# EAGLE board multiprise (EAGLE 5.06)
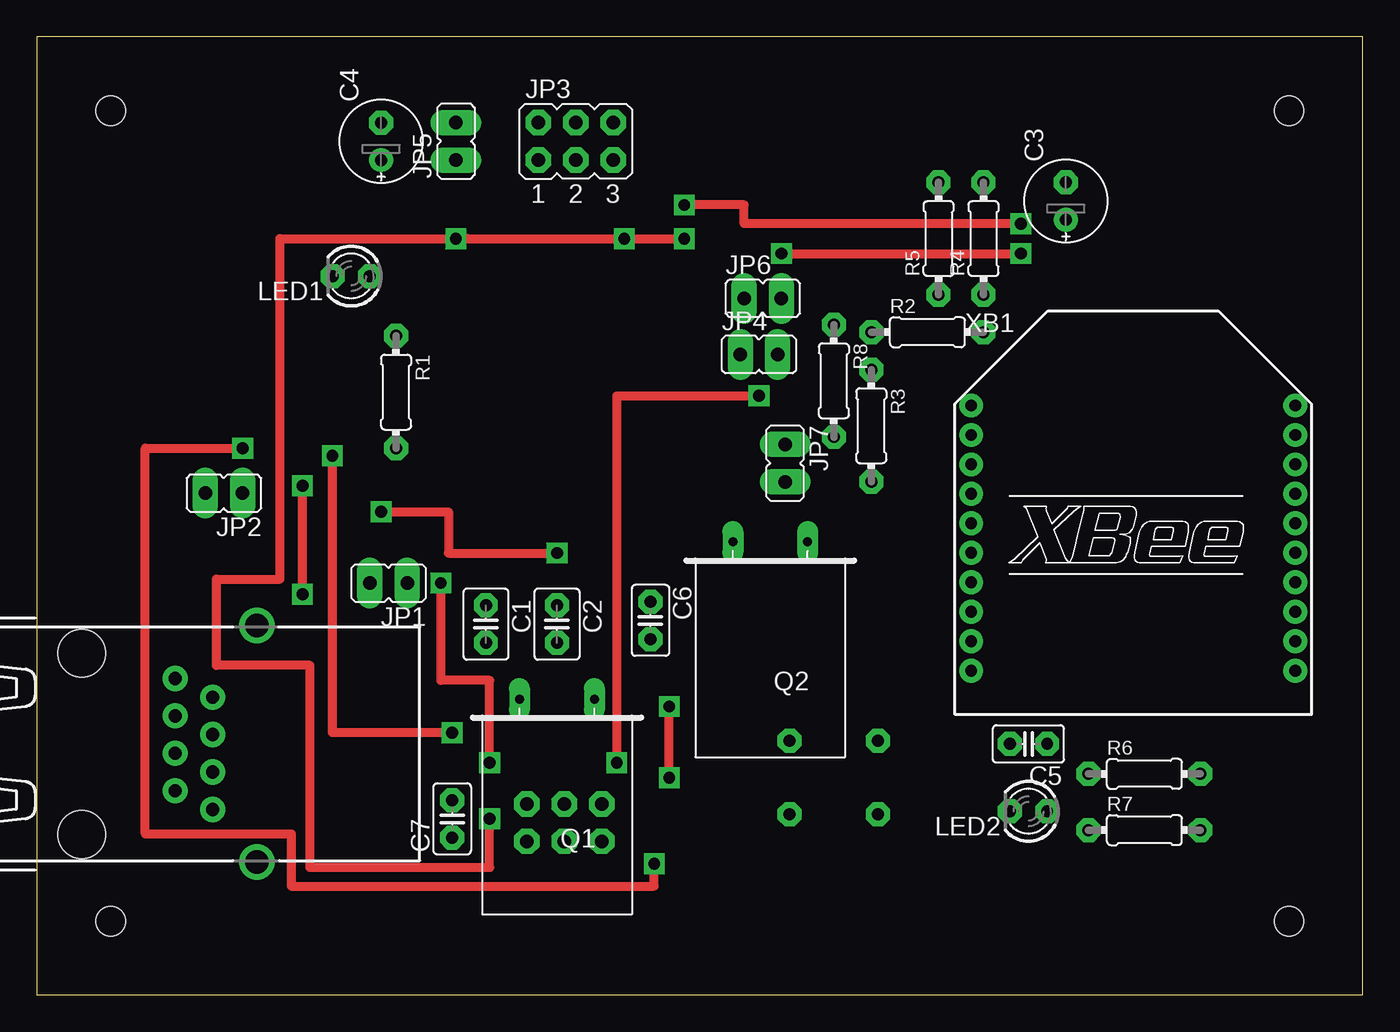
[diagram p0: board, top side]
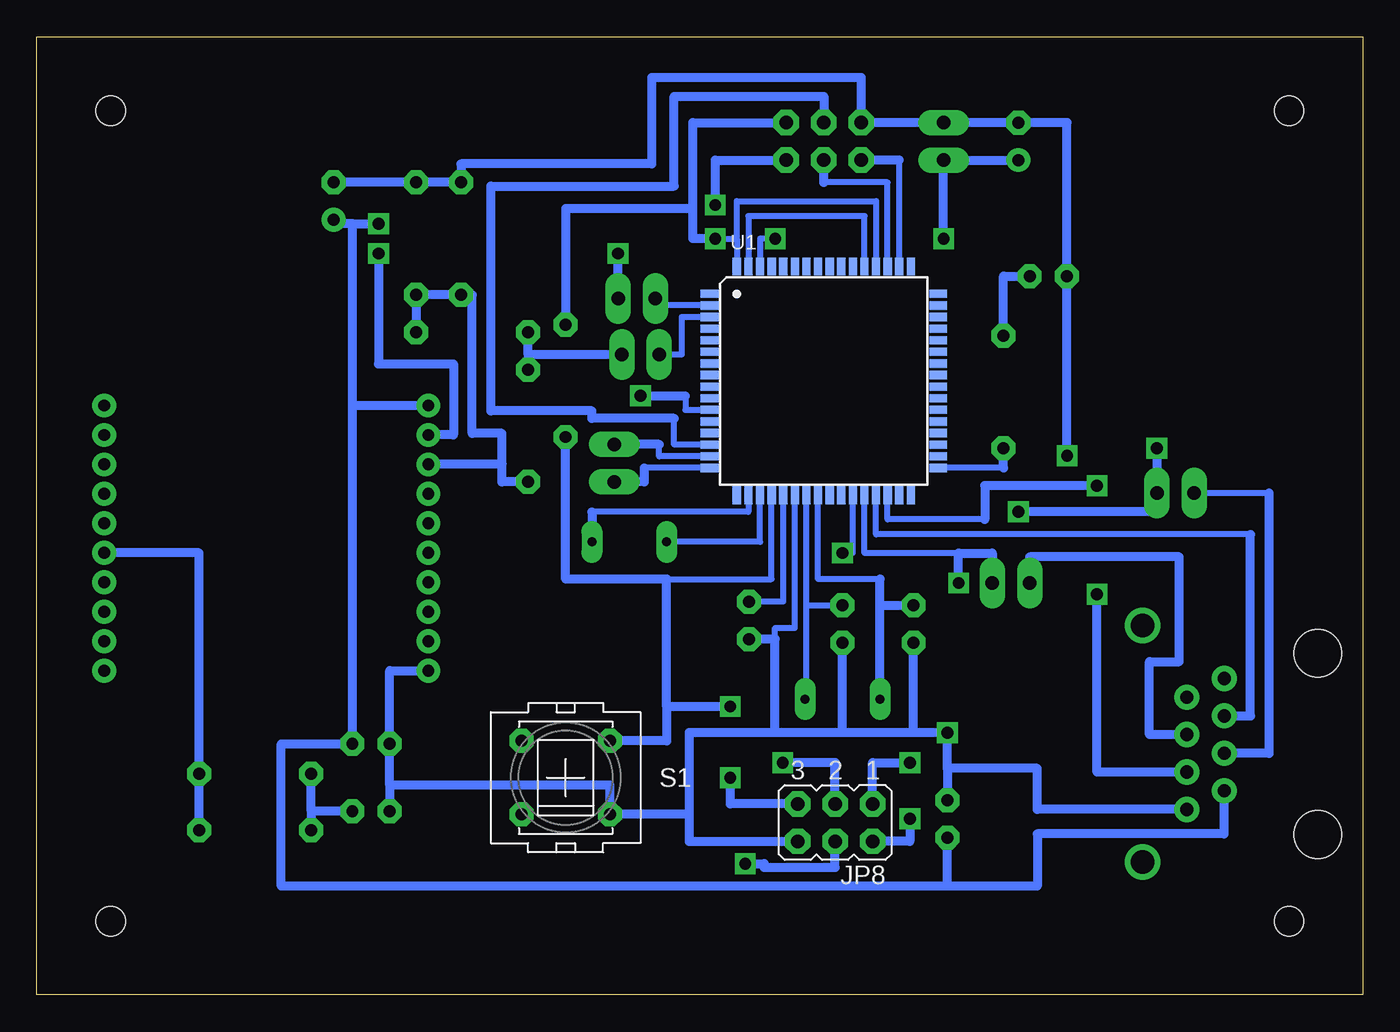
[diagram p1: board, bottom side, seen from below]

Size 90 x 65 mm. Coordinates in mm from the lower left corner, seen from the top.
Outline: 0,0 90,0 90,65 0,65 0,0
Copper layers (1*16): Top 0.035mm / dielectric 1.5mm / Bottom 0.035mm
Design rules "DesignRules": minimum track width 16mil, minimum drill 24mil, track to track 14mil, track to pad 12mil, pad to pad 8mil, via to via 16mil, smd to smd 8mil, copper to edge 40mil, drill to drill 8mil, minimum pad ring 16mil, minimum via ring 12mil, stop-mask expansion 4mil, vias tented up to drill 0mil, thermal gap 10mil
Holes 2 mm at 5,60 5,5 85,5 85,60

## Footprints (pad centres in the part's own frame; a part is rotated, then mirrored left to right if it is on the bottom)
C2.5-3 = drill 0.813 pad 1.6 octagon: 1 -1.27,0; 2 1.27,0
E2,5-6E = drill 0.813 pad 1.575 round: + -1.27,0 | drill 0.813 pad 1.575 octagon: - 1.27,0
C025-025X050 = drill 0.813 octagon: 1 -1.27,0; 2 1.27,0
JP1 = drill 0.914 long: 1 0,-1.27; 2 0,1.27
JP3Q = drill 0.914 octagon: 1 -2.54,-1.27; 2 -2.54,1.27; 3 0,-1.27; 4 0,1.27; 5 2.54,-1.27; 6 2.54,1.27
LED3MM = drill 0.813 octagon: A -1.27,0; K 1.27,0
Q = drill 0.61 long: 1 -2.54,-7.62; 2 2.54,-7.62
0204/7 = drill 0.813 octagon: 1 -3.81,0; 2 3.81,0
PVA1R = drill 0.813 octagon: 1 -2.997,2.489; 2 -2.997,-2.489; 3 2.997,2.489; 4 2.997,-2.489
TQFP64 = smd 1.194 x 0.559: 1 -7.76,5.905; 2 -7.76,5.118; 3 -7.76,4.331; 4 -7.76,3.543; 5 -7.76,2.756; 6 -7.76,1.968; 7 -7.76,1.181; 8 -7.76,0.394; 9 -7.76,-0.394; 10 -7.76,-1.181; 11 -7.76,-1.968; 12 -7.76,-2.756; 13 -7.76,-3.543; 14 -7.76,-4.331; 15 -7.76,-5.118; 16 -7.76,-5.905; 33 7.76,-5.905; 34 7.76,-5.118; 35 7.76,-4.331; 36 7.76,-3.543; 37 7.76,-2.756; 38 7.76,-1.968; 39 7.76,-1.181; 40 7.76,-0.394; 41 7.76,0.394; 42 7.76,1.181; 43 7.76,1.968; 44 7.76,2.756; 45 7.76,3.543; 46 7.76,4.331; 47 7.76,5.118; 48 7.76,5.905 | smd 0.559 x 1.194: 17 -5.905,-7.76; 18 -5.118,-7.76; 19 -4.331,-7.76; 20 -3.543,-7.76; 21 -2.756,-7.76; 22 -1.968,-7.76; 23 -1.181,-7.76; 24 -0.394,-7.76; 25 0.394,-7.76; 26 1.181,-7.76; 27 1.968,-7.76; 28 2.756,-7.76; 29 3.543,-7.76; 30 4.331,-7.76; 31 5.118,-7.76; 32 5.905,-7.76; 49 5.905,7.76; 50 5.118,7.76; 51 4.331,7.76; 52 3.543,7.76; 53 2.756,7.76; 54 1.968,7.76; 55 1.181,7.76; 56 0.394,7.76; 57 -0.394,7.76; 58 -1.181,7.76; 59 -1.968,7.76; 60 -2.756,7.76; 61 -3.543,7.76; 62 -4.331,7.76; 63 -5.118,7.76; 64 -5.905,7.76
XBEE = drill 0.8 pad 1.27 round: 1 -11,9; 2 -11,7; 3 -11,5; 4 -11,3; 5 -11,1; 6 -11,-1; 7 -11,-3; 8 -11,-5; 9 -11,-7; 10 -11,-9; 11 11,-9; 12 11,-7; 13 11,-5; 14 11,-3; 15 11,-1; 16 11,1; 17 11,3; 18 11,5; 19 11,7; 20 11,9
XPORT = drill 0.9 pad 1.422 round: 1 1.27,-4.445; 2 -1.27,-3.175; 3 1.27,-1.905; 4 -1.27,-0.635; 5 1.27,0.635; 6 -1.27,1.905; 7 1.27,3.175; 8 -1.27,4.445 | drill 1.6 pad 2.2 round: SH1 4.28,8.025; SH2 4.28,-8.025 | hole 3.25: -7.62,-6.15; -7.62,6.15

## Placement (x,y rotation side)
C1  22p  [C2.5-3]  30.48,25.15 270 top
C2  22p  [C2.5-3]  35.31,25.15 270 top
C3  [E2,5-6E]  69.85,53.85 90 top
C4  [E2,5-6E]  23.37,57.91 90 top
C5  [C025-025X050]  67.31,17.02 180 top
C6  [C025-025X050]  41.66,25.4 270 top
C7  [C025-025X050]  28.19,11.94 90 top
JP1  [JP1]  23.88,27.94 90 top
JP2  [JP1]  12.7,34.04 90 top
JP3  [JP3Q]  36.58,57.91 0 top
JP4  [JP1]  49.02,43.43 270 top
JP5  [JP1]  28.45,57.91 0 top
JP6  [JP1]  49.28,47.24 270 top
JP7  [JP1]  50.8,36.07 180 top
JP8  [JP3Q]  35.81,11.68 180 bottom
LED1  [LED3MM]  21.34,48.77 180 top
LED2  [LED3MM]  67.31,12.45 180 top
Q1  [Q]  35.31,12.45 180 top
Q2  [Q]  49.78,23.11 180 top
R1  R  [0204/7]  24.38,40.89 270 top
R2  R  [0204/7]  60.45,44.96 0 top
R3  10k  [0204/7]  56.64,38.61 270 top
R4  R  [0204/7]  64.26,51.31 90 top
R5  15k  [0204/7]  61.21,51.31 90 top
R6  R  [0204/7]  75.18,14.99 0 top
R7  R  [0204/7]  75.18,11.18 0 top
R8  10k  [0204/7]  54.1,41.66 270 top
S1  PVA1R  [PVA1R]  54.1,14.73 0 bottom
U1  ATMEGA128_TQPF  [TQFP64]  36.58,41.66 0 bottom
XB1  XBEE  [XBEE]  74.42,30.99 0 top
XP1  XPORT  [XPORT]  10.67,17.02 0 top

## Library data of the parts
C1 C2 = capacitor-wima
C3-C7 = rcl
JP1-JP8 = jumper
LED1 LED2 = led
Q1 Q2 = special
R1-R8 = resistor
S1 = switch-misc
U1 = Atmel_Prototype_Header
XB1 = maxstream
XP1 = lantronix

## Nets
N$1: JP2.2 XP1.4
N$2: JP3.4 U1.14
N$3: JP2.1 JP8.4 U1.27
N$4: JP1.1 JP8.1 U1.28
N$5: C1.1 Q1.2 U1.24
N$6: C2.1 Q1.1 U1.23
N$7: JP8.5 R8.2 S1.3 U1.20
N$8: C4.+ JP3.6 JP5.1 JP8.2 R8.1 U1.52 U1.62 U1.64
N$9: Q2.1 U1.18
N$10: Q2.2 U1.19
N$11: U1.30 XP1.3
N$12: U1.29 XP1.6
N$13: R1.2 U1.33
N$14: JP4.2 R2.1 R3.1
N$15: R2.2 R3.2 R4.1 R5.1 XB1.3
N$16: JP6.2 XB1.2
N$17: R6.2 R7.2 XB1.15
N$18: LED2.A R6.1 R7.1
N$19: JP1.2 XP1.5
N$20: JP7.1 U1.15
N$21: JP7.2 U1.16
N$22: JP3.3 U1.51
N$23: JP3.1 U1.50
N$24: U1.53 U1.63
N$25: JP4.1 U1.3
N$26: C6.1 U1.21
N$27: C3.+ C5.1 C7.1 JP3.5 XB1.1 XP1.2
N$28: LED1.A R1.1
N$30: JP6.1 U1.2
N$31: C1.2 C2.2 C3.- C4.- C5.2 C6.2 C7.2 JP3.2 JP5.2 JP8.6 LED1.K LED2.K R4.2 R5.2 S1.4 U1.22 XB1.10 XP1.1
N$33: JP8.3 U1.11

## Tracks (layer width: path | path; a pad name or v marks a point on that pad's centre or on a via)
N$1
  Bottom 0.406: 6.35,34.04 JP2.2
  Bottom 0.61: 6.35,34.04 6.35,16.38 XP1.4
N$2
  Bottom 0.406: U1.14 46.74,37.33 46.74,39.12
  Bottom 0.61: 46.74,39.12 52.32,39.12 52.32,39.62 59.18,39.62 59.18,54.86 46.74,54.86 46.74,60.96 36.58,60.96 JP3.4
N$3  (via drill 0.8)
  Top 0.61: v23.37,32.77 27.94,32.77 27.94,29.97 v35.31,29.97 | v41.91,8.89 41.91,7.37 17.27,7.37 17.27,10.92 7.37,10.92 7.37,37.08 v13.97,37.08
  Bottom 0.406: JP2.1 13.97,32.77 | v35.31,29.97 34.61,29.97 U1.27
  Bottom 0.61: 13.97,32.77 v23.37,32.77 | JP8.4 35.81,8.64 40.64,8.64 40.64,8.89 v41.91,8.89 | v13.97,37.08 JP2.1
N$4  (via drill 0.8)
  Top 0.61: v30.73,15.75 30.73,21.34 27.43,21.34 v27.43,27.94
  Bottom 0.406: 27.43,29.97 33.82,29.97 U1.28
  Bottom 0.61: JP1.1 25.15,29.97 27.43,29.97 v27.43,27.94 | JP8.1 33.27,15.75 v30.73,15.75
N$5
  Bottom 0.406: 32.77,28.19 36.97,28.19 U1.24
  Bottom 0.61: 32.77,26.42 C1.1 | 32.77,26.42 32.77,28.19 | Q1.2 32.77,26.42
N$6
  Bottom 0.406: 37.76,26.42 C2.1 | Q1.1 37.76,20.07 37.76,26.42 | 37.76,26.42 U1.23
N$7  (via drill 0.8)
  Top 0.61: v42.93,14.73 v42.93,19.56
  Bottom 0.406: 47.24,28.19 40.12,28.19 U1.20
  Bottom 0.61: S1.3 47.24,17.22 47.24,19.56 | R8.2 54.1,28.19 47.24,28.19 47.24,19.56 | JP8.5 42.93,12.95 v42.93,14.73 | v42.93,19.56 47.24,19.56
N$8  (via drill 0.8)
  Top 0.61: v43.94,51.31 v39.88,51.31 29.21,51.31 | 29.21,51.31 v28.45,51.31 | v30.73,11.94 30.73,8.64 18.54,8.64 18.54,22.35 12.19,22.35 12.19,28.19 16.51,28.19 16.51,51.31 29.21,51.31
  Bottom 0.406: U1.52 33.03,53.85 42.48,53.85 42.48,51.31 | 42.48,51.31 U1.64 | U1.62 40.91,51.31 v39.88,51.31 | v43.94,51.31 42.48,51.31
  Bottom 0.61: R8.1 54.1,53.34 45.47,53.34 | 45.47,53.34 45.47,59.18 JP3.6 | 45.47,53.34 45.47,51.31 v43.94,51.31 | v28.45,51.31 JP5.1 C4.+ | JP8.2 30.73,10.41 v30.73,11.94
N$9
  Bottom 0.406: 52.32,32.77 41.69,32.77 U1.18
  Bottom 0.61: 52.32,32.77 Q2.1
N$10
  Bottom 0.406: Q2.2 40.91,30.73 U1.19
N$11  (via drill 0.8)
  Top 0.61: v18.03,27.18 v18.03,34.54
  Bottom 0.406: 25.65,32.26 32.24,32.26 U1.30
  Bottom 0.61: XP1.3 18.03,15.11 v18.03,27.18 | v18.03,34.54 25.65,34.54 25.65,32.26
N$12
  Bottom 0.406: 7.62,31.24 33.03,31.24 U1.29
  Bottom 0.61: 7.62,31.24 7.62,18.92 XP1.6
N$13
  Bottom 0.406: 24.38,35.75 U1.33
  Bottom 0.61: 24.38,35.75 R1.2
N$14
  Bottom 0.61: 56.64,43.43 R3.1 | 56.64,43.43 R2.1 | JP4.2 56.64,43.43
N$15
  Bottom 0.61: R3.2 58.42,34.8 58.42,36.07 | 58.42,36.07 58.42,38.1 60.45,38.1 60.45,47.5 R5.1 R4.1 R2.2 | XB1.3 58.42,35.99 58.42,36.07
N$16  (via drill 0.8)
  Top 0.61: v50.55,50.29 v66.8,50.29
  Bottom 0.61: JP6.2 v50.55,50.29 | v66.8,50.29 66.8,42.81 61.72,42.81 61.72,37.99 XB1.2
N$17
  Bottom 0.61: R7.2 R6.2 78.99,29.99 XB1.15
N$18
  Bottom 0.61: 71.37,12.45 R7.1 | 71.37,12.45 R6.1 | LED2.A 71.37,12.45
N$19
  Bottom 0.406: 22.61,29.72 JP1.2
  Bottom 0.61: 22.61,29.72 12.45,29.72 12.45,22.61 14.48,22.61 14.48,17.65 XP1.5
N$20
  Bottom 0.406: U1.15 47.75,36.54 47.75,37.34
  Bottom 0.61: 47.75,37.34 JP7.1
N$21
  Bottom 0.406: U1.16 48.77,35.75
  Bottom 0.61: 48.77,35.75 48.77,34.8 JP7.2
N$22
  Bottom 0.406: 36.58,55.12 32.24,55.12 U1.51
  Bottom 0.61: 36.58,55.12 JP3.3
N$23
  Bottom 0.406: U1.50 31.46,56.64
  Bottom 0.61: 31.46,56.64 JP3.1
N$24
  Bottom 0.406: U1.63 41.69,52.83 33.82,52.83 U1.53
N$25
  Bottom 0.406: JP4.1 46.23,43.43 46.23,45.99 U1.3
N$26
  Bottom 0.406: C6.1 39.33,26.67 U1.21
N$27  (via drill 0.8)
  Top 0.61: v43.94,53.59 48.01,53.59 48.01,52.32 v66.8,52.32
  Bottom 0.61: 28.19,7.37 22.1,7.37 22.1,10.92 9.4,10.92 XP1.2 | 28.19,7.37 73.41,7.37 73.41,17.02 C5.1 68.58,39.99 | 28.19,7.37 C7.1 | 68.58,39.99 XB1.1 | JP3.5 43.94,56.64 v43.94,53.59 | 68.58,52.32 v66.8,52.32 | 68.58,39.99 68.58,52.32 | 68.58,52.32 69.85,52.32 C3.+
N$28
  Bottom 0.61: R1.1 24.38,48.77 LED1.A
N$30
  Bottom 0.406: U1.2 47.75,46.77 47.75,47.24 JP6.1
N$31  (via drill 0.8)
  Top 0.61: v20.07,36.58 20.07,17.78 v28.19,17.78
  Bottom 0.406: 39.88,24.13 39.88,24.89 38.54,24.89 U1.22
  Bottom 0.61: 30.48,17.78 35.31,17.78 | 35.31,17.78 C2.2 | 35.31,17.78 39.88,17.78 | 39.88,17.78 39.88,24.13 C6.2 | 39.88,17.78 45.72,17.78 45.72,12.24 | 45.72,12.24 S1.4 51.1,14.22 66.04,14.22 | 28.19,15.37 22.1,15.37 22.1,12.57 XP1.1 | 30.48,17.78 C1.2 | 28.19,15.37 C7.2 | XB1.10 66.04,21.99 C5.2 66.04,14.22 | 66.04,14.22 LED2.K | v20.07,36.58 LED1.K 20.07,59.18 C4.- JP5.2 JP3.2 34.04,62.23 48.26,62.23 48.26,56.39 61.21,56.39 R5.2 R4.2 C3.- | 30.48,17.78 v28.19,17.78 28.19,15.37 | JP8.6 45.72,10.41 45.72,12.24
N$33  (via drill 0.8)
  Top 0.61: v39.37,15.75 39.37,40.64 v49.02,40.64
  Bottom 0.406: U1.11 45.97,39.69 45.97,40.64
  Bottom 0.61: JP8.3 35.81,15.75 v39.37,15.75 | v49.02,40.64 48.51,40.64 | 48.51,40.64 46.48,40.64 | 48.51,40.64 45.97,40.64